# EAGLE board Genus_MainBoard_Std - v.1.0 (EAGLE 9.5.2), part 1 of 2
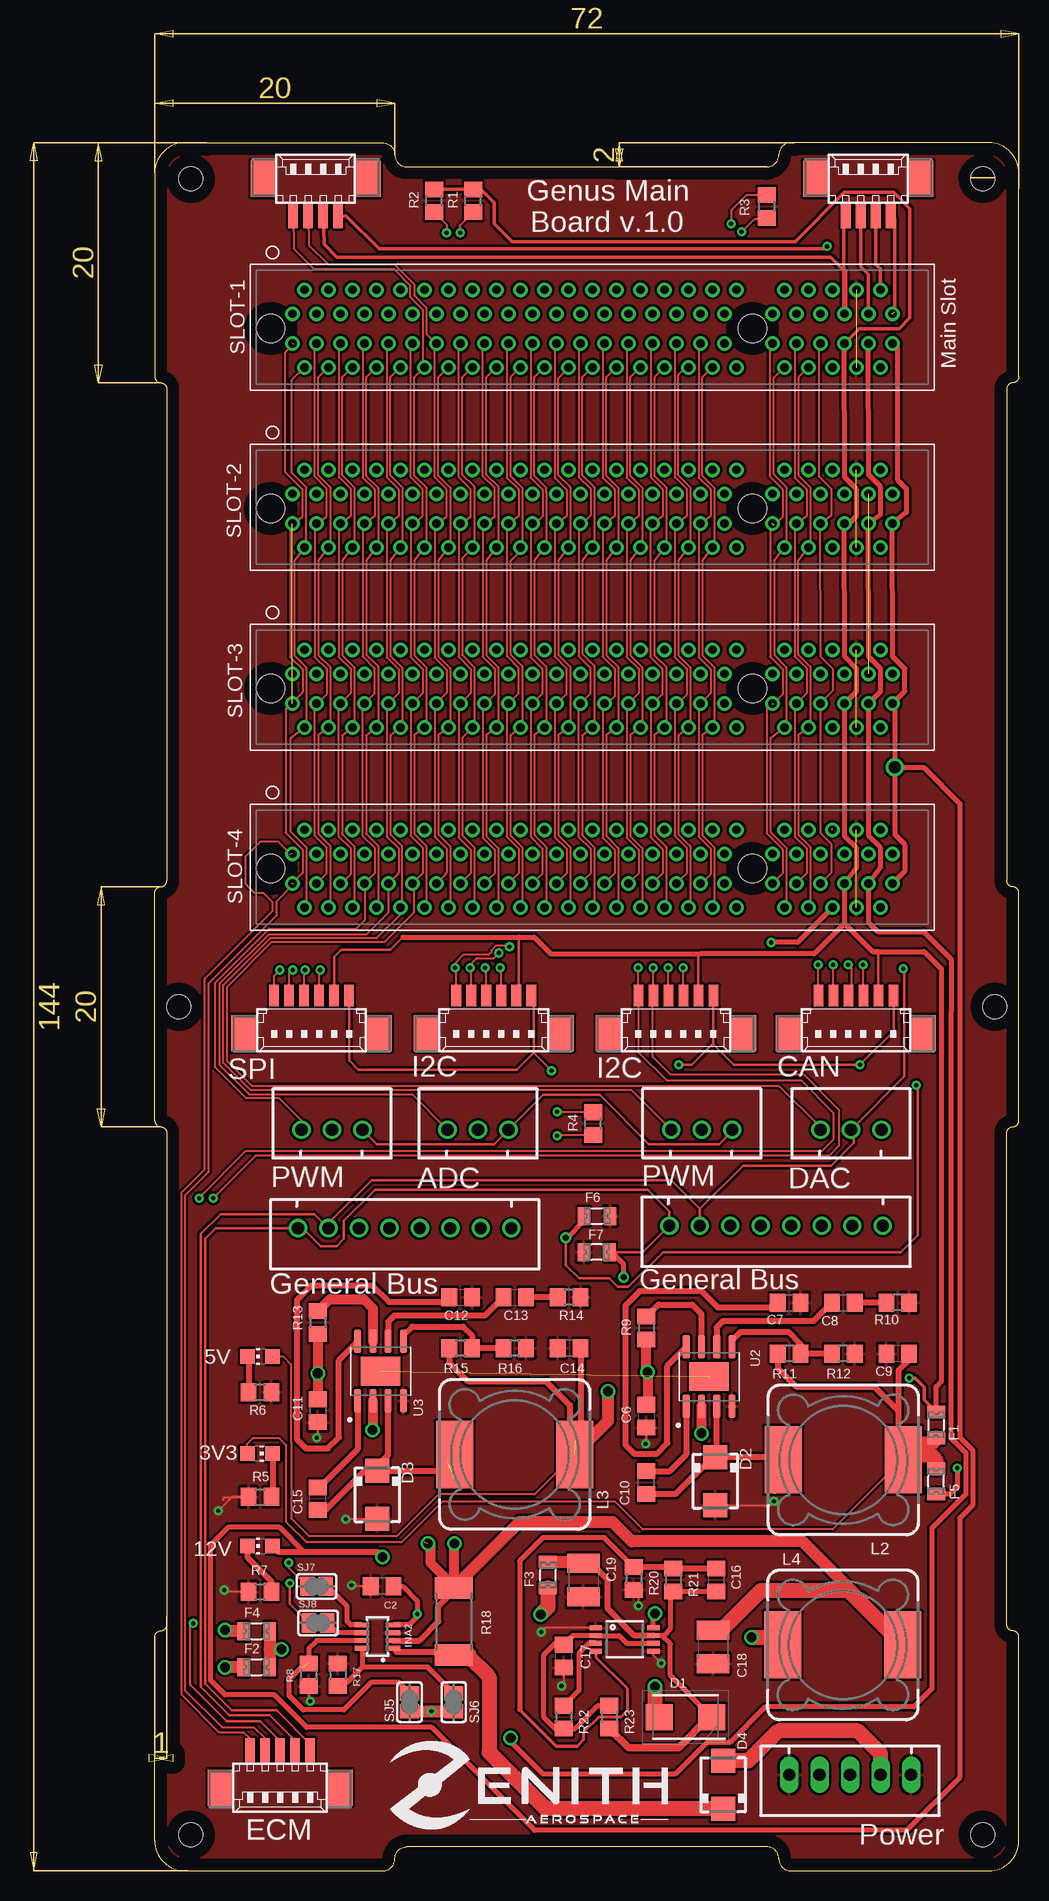
[diagram p0: board, top side]
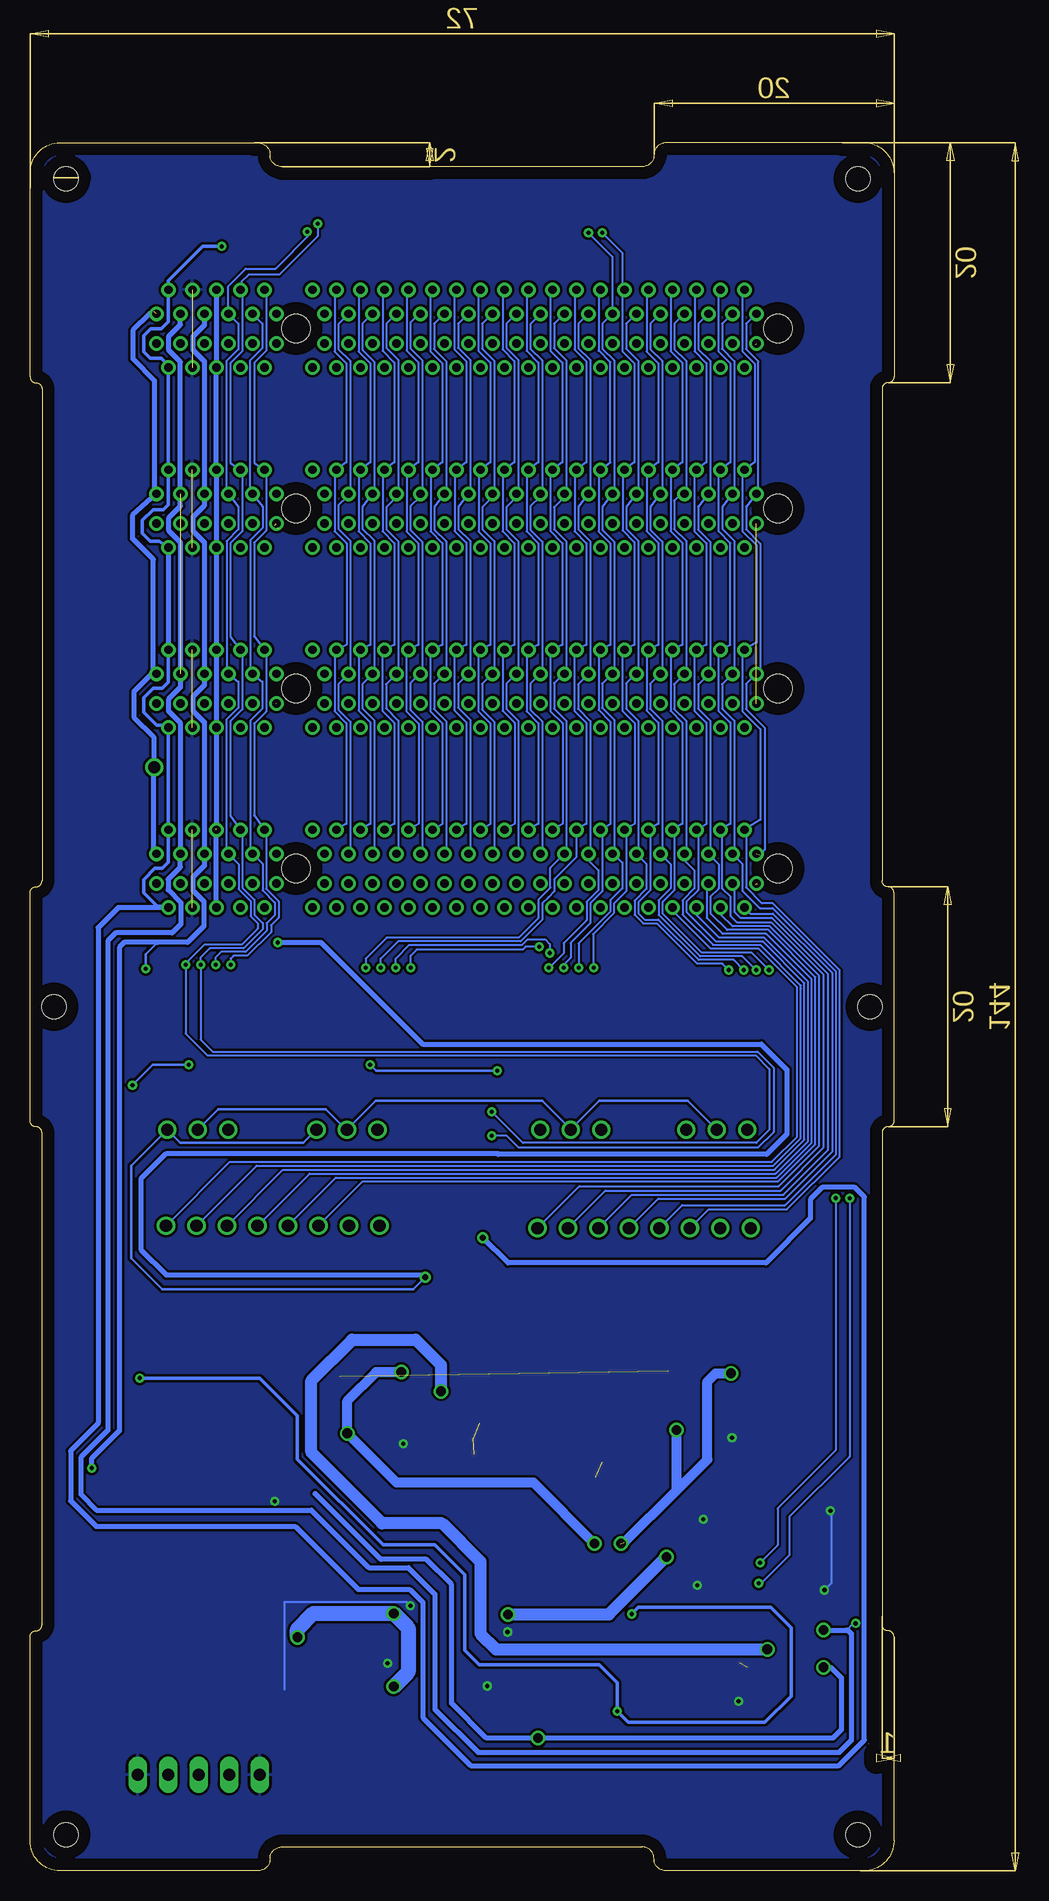
[diagram p1: board, bottom side, seen from below]

Size 72 x 144 mm. Coordinates in mm from the lower left corner, seen from the top.
Outline: 0,2.5 0,19.5 arc-90 0.5,20 arc90 1,20.5 1,61.5 arc90 0.5,62 arc-90 0,62.5 0,81.5 arc-90 0.5,82 arc90 1,82.5 1,123.5 arc90 0.5,124 arc-90 0,124.5 0,141.5 arc-90 2.5,144 19,144 arc-90 20,143 arc90 21,142 51,142 arc90 52,143 arc-90 53,144 69.5,144 arc-90 72,141.5 72,124.5 arc-90 71.5,124 arc90 71,123.5 71,82.5 arc90 71.5,82 arc-90 72,81.5 72,62.5 arc-90 71.5,62 arc90 71,61.5 71,20.5 arc90 71.5,20 arc-90 72,19.5 72,2.5 arc-90 69.5,0 53,0 arc-90 52,1 arc90 51,2 21,2 arc90 20,1 arc-90 19,0 2.5,0 arc-90 0,2.5
Copper layers (1*16): Top 0.035mm / dielectric 1.5mm / Bottom 0.035mm
Design rules "default": minimum track width 6mil, minimum drill 0.35mm, track to track 6mil, track to pad 6mil, pad to pad 6mil, via to via 6mil, smd to smd 6mil, copper to edge 40mil, drill to drill 6mil, minimum pad ring 10mil, minimum via ring 8mil, stop-mask expansion 4mil, vias tented up to drill 0mil, thermal gap 10mil
Holes 2 mm at 69,141 3,141 3,3 69,3 70,72 2,72

## Footprints (pad centres in the part's own frame; a part is rotated, then mirrored left to right if it is on the bottom)
CHIP-LED0805 = smd 1.2 x 1.2: A 0,-1.05; C 0,1.05
C0805 = smd 1.3 x 1.5: 1 -0.95,0; 2 0.95,0
C1210 = smd 1.6 x 2.7: 1 -1.4,0; 2 1.4,0
DIOM5436X247N = smd 2.25 x 2.15: 1 -2.2,0; 2 2.2,0
SMA = smd 2 x 2: A 2,0; C -2,0
0805L = smd 1 x 1.5: 1 -1.1,0; 2 1.1,0
SOT23-8 = smd 0.4 x 1.2: 1 -0.975,-1.3; 2 -0.325,-1.3; 3 0.325,-1.3; 4 0.975,-1.3; 5 0.975,1.3; 6 0.325,1.3; 7 -0.325,1.3; 8 -0.975,1.3
SRR1280 = smd 5.6 x 3.1: 1 0.635,5; 2 0.635,-5
R0805 = smd 1.3 x 1.5: 1 -0.95,0; 2 0.95,0
R2512 = smd 1.8 x 3.2: 1 -2.8,0; 2 2.8,0
SOLDERJUMPER_REFLOW_NOPASTE = smd 1.168 x 1.6: 1 -0.762,0; 2 0.762,0
PCIE-098-02-X-D-TH = drill 0.7 pad 1.1: A1 25,-1.24; A2 24,-3.24; A3 23,-1.24; A4 22,-3.24; A5 21,-1.24; A6 20,-3.24; A7 19,-1.24; A8 18,-3.24; A9 17,-1.24; A10 16,-3.24; A11 15,-1.24; A12 12,-3.24; A13 11,-1.24; A14 10,-3.24; A15 9,-1.24; A16 8,-3.24; A17 7,-1.24; A18 6,-3.24; A19 5,-1.24; A20 4,-3.24; A21 3,-1.24; A22 2,-3.24; A23 1,-1.24; A24 0,-3.24; A25 -1,-1.24; A26 -2,-3.24; A27 -3,-1.24; A28 -4,-3.24; A29 -5,-1.24; A30 -6,-3.24; A31 -7,-1.24; A32 -8,-3.24; A33 -9,-1.24; A34 -10,-3.24; A35 -11,-1.24; A36 -12,-3.24; A37 -13,-1.24; A38 -14,-3.24; A39 -15,-1.24; A40 -16,-3.24; A41 -17,-1.24; A42 -18,-3.24; A43 -19,-1.24; A44 -20,-3.24; A45 -21,-1.24; A46 -22,-3.24; A47 -23,-1.24; A48 -24,-3.24; A49 -25,-1.24; B1 25,1.24; B2 24,3.24; B3 23,1.24; B4 22,3.24; B5 21,1.24; B6 20,3.24; B7 19,1.24; B8 18,3.24; B9 17,1.24; B10 16,3.24; B11 15,1.24; B12 12,3.24; B13 11,1.24; B14 10,3.24; B15 9,1.24; B16 8,3.24; B17 7,1.24; B18 6,3.24; B19 5,1.24; B20 4,3.24; B21 3,1.24; B22 2,3.24; B23 1,1.24; B24 0,3.24; B25 -1,1.24; B26 -2,3.24; B27 -3,1.24; B28 -4,3.24; B29 -5,1.24; B30 -6,3.24; B31 -7,1.24; B32 -8,3.24; B33 -9,1.24; B34 -10,3.24; B35 -11,1.24; B36 -12,3.24; B37 -13,1.24; B38 -14,3.24; B39 -15,1.24; B40 -16,3.24; B41 -17,1.24; B42 -18,3.24; B43 -19,1.24; B44 -20,3.24; B45 -21,1.24; B46 -22,3.24; B47 -23,1.24; B48 -24,3.24; B49 -25,1.24 | hole 2.35: 13.35,0; -26.81,0
SOIC127P600X170-9N = smd 1.97 x 0.6: 1 -2.475,1.905; 2 -2.475,0.635; 3 -2.475,-0.635; 4 -2.475,-1.905; 5 2.475,-1.905; 6 2.475,-0.635; 7 2.475,0.635; 8 2.475,1.905 | smd 2.41 x 3.3: 9 0,0
MSOP-8 = smd 0.41 x 1.02: 1 -0.975,-2.4; 2 -0.325,-2.4; 3 0.325,-2.4; 4 0.975,-2.4; 5 0.975,2.4; 6 0.325,2.4; 7 -0.325,2.4; 8 -0.975,2.4
53398-06 = smd 0.8 x 1.8: 1 3.125,-2.5; 2 1.875,-2.5; 3 0.625,-2.5; 4 -0.625,-2.5; 5 -1.875,-2.5; 6 -3.125,-2.5 | smd 2.1 x 3: S1 5.625,0.625; S2 -5.625,0.625
JST-XH-03-PACKAGE-ROUND-PAD = drill 1.016: 1 -2.54,0; 2 0,0; 3 2.54,0
JST-XH-08-PACKAGE-ROUND-PAD = drill 1.016: 1 -8.89,0; 2 -6.35,0; 3 -3.81,0; 4 -1.27,0; 5 1.27,0; 6 3.81,0; 7 6.35,0; 8 8.89,0
53261-04 = smd 0.8 x 2: 1 1.875,-2.5; 2 0.625,-2.5; 3 -0.625,-2.5; 4 -1.875,-2.5 | smd 2.1 x 3: S1 4.375,0.625; S2 -4.375,0.625
53261-05 = smd 0.8 x 2: 1 2.5,-2.5; 2 1.25,-2.5; 3 0,-2.5; 4 -1.25,-2.5; 5 -2.5,-2.5 | smd 2.1 x 3: S1 5,0.625; S2 -5,0.625
JST-XH-05-PACKAGE-LONG-PAD = drill 1.016 long: 1 -5.08,0; 2 -2.54,0; 3 0,0; 4 2.54,0; 5 5.08,0

## Placement (x,y rotation side)
3V3  [CHIP-LED0805]  8.76,34.76 270 top
5V  [CHIP-LED0805]  8.76,42.86 90 top
12V  [CHIP-LED0805]  8.76,27.06 90 top
C2  [C0805]  18.94,23.7 180 top
C6  10uF  [C0805]  40.96,37.89 270 top
C7  0.1uF  [C0805]  52.87,47.35 0 top
C8  3.9nF  [C0805]  57.38,47.35 0 top
C9  22uF  [C0805]  61.91,43.1 180 top
C10  10nF  [C0805]  40.96,32.35 90 top
C11  10uF  [C0805]  13.58,38.34 270 top
C12  0.1uF  [C0805]  25.49,47.8 0 top
C13  3.9nF  [C0805]  30,47.8 0 top
C14  22uF  [C0805]  34.53,43.55 180 top
C15  10nF  [C0805]  13.58,31 90 top
C16  39pF  [C0805]  46.77,24.24 270 top
C17  100nF  [C0805]  34.07,17.89 90 top
C18  22uF  [C1210]  46.52,18.65 270 top
C19  68uF  [C1210]  35.72,24.24 270 top
D1  MBRS140T3G  [DIOM5436X247N]  44.23,12.81 180 top
D2  B130-13-F  [SMA]  46.71,32.47 270 top
D3  B130-13-F  [SMA]  18.53,31.32 270 top
D4  S1M  [SMA]  47.36,7.16 90 top
F1  0805L075  [0805L]  65.11,37.16 270 top
F2  0805L075  [0805L]  8.46,16.96 0 top
F3  0805L075  [0805L]  32.76,24.66 90 top
F4  0805L075  [0805L]  8.46,19.96 0 top
F5  0805L075  [0805L]  65.11,32.46 90 top
F6  0805L075  [0805L]  36.86,54.56 0 top
F7  0805L075  [0805L]  36.83,51.56 180 top
INA2  INA219BIDCNT  [SOT23-8]  18.56,19.51 90 top
L2  SRR1280  [SRR1280]  57.37,33.61 90 top
L3  SRR1280  [SRR1280]  29.99,34.06 90 top
L4  6.8uH  [SRR1280]  57.34,19.46 270 top
R1  4,7k  [R0805]  26.52,139.17 90 top
R2  4,7k  [R0805]  23.27,139.17 90 top
R3  120  [R0805]  50.98,138.7 270 top
R4  120  [R0805]  36.52,62.26 90 top
R5  220  [R0805]  8.76,31.16 0 top
R6  330  [R0805]  8.76,39.86 180 top
R7  600  [R0805]  8.76,23.26 0 top
R8  10K  [R0805]  12.85,16.34 90 top
R9  100K  [R0805]  40.96,45.23 270 top
R10  6.8K  [R0805]  61.91,47.35 180 top
R11  26.1K  [R0805]  52.87,43.1 180 top
R12  10K  [R0805]  57.38,43.1 180 top
R13  100K  [R0805]  13.58,45.68 270 top
R14  6.8K  [R0805]  34.53,47.8 180 top
R15  26.1K  [R0805]  25.49,43.55 180 top
R16  10K  [R0805]  30,43.55 180 top
R17  10K  [R0805]  15.26,16.34 270 top
R18  0.1  [R2512]  24.91,20.78 270 top
R20  50K  [R0805]  39.91,24.36 270 top
R21  150K  [R0805]  43.21,24.24 270 top
R22  200K  [R0805]  34.07,12.81 270 top
R23  200K  [R0805]  37.88,12.81 270 top
SJ5  [SOLDERJUMPER_REFLOW_NOPASTE]  21.23,14.05 90 top
SJ6  [SOLDERJUMPER_REFLOW_NOPASTE]  24.91,14.05 90 top
SJ7  [SOLDERJUMPER_REFLOW_NOPASTE]  13.48,23.7 0 top
SJ8  [SOLDERJUMPER_REFLOW_NOPASTE]  13.61,20.65 0 top
SLOT-1  PCIE-098-02-X-D-TH  [PCIE-098-02-X-D-TH]  36.47,128.51 0 top
SLOT-2  PCIE-098-02-X-D-TH  [PCIE-098-02-X-D-TH]  36.47,113.51 0 top
SLOT-3  PCIE-098-02-X-D-TH  [PCIE-098-02-X-D-TH]  36.47,98.51 0 top
SLOT-4  PCIE-098-02-X-D-TH  [PCIE-098-02-X-D-TH]  36.47,83.51 0 top
U2  MP2307DN-LF-Z  [SOIC127P600X170-9N]  46.19,41.19 90 top
U3  MP2307DN-LF-Z  [SOIC127P600X170-9N]  18.81,41.64 90 top
U$3  LM2621SMD  [MSOP-8]  39.15,19.28 270 top
X1  53398-06  [53398-06]  28.25,70.43 180 top
X2  53398-06  [53398-06]  43.43,70.43 180 top
X3  JST-XH-03-PIN-ROUND-PAD  [JST-XH-03-PACKAGE-ROUND-PAD]  14.77,61.76 0 top
X4  JST-XH-03-PIN-ROUND-PAD  [JST-XH-03-PACKAGE-ROUND-PAD]  45.59,61.76 0 top
X5  53398-06  [53398-06]  58.42,70.43 180 top
X6  JST-XH-03-PIN-ROUND-PAD  [JST-XH-03-PACKAGE-ROUND-PAD]  26.93,61.76 0 top
X7  JST-XH-03-PIN-ROUND-PAD  [JST-XH-03-PACKAGE-ROUND-PAD]  58.02,61.76 0 top
X8  JST-XH-08-PIN-ROUND-PAD  [JST-XH-08-PACKAGE-ROUND-PAD]  51.77,53.76 180 top
X9  53398-06  [53398-06]  13.06,70.43 180 top
X10  JST-XH-08-PIN-ROUND-PAD  [JST-XH-08-PACKAGE-ROUND-PAD]  20.82,53.56 180 top
X11  53261-04  [53261-04]  13.4,140.4 0 top
X12  53261-04  [53261-04]  59.46,140.4 0 top
X13  53261-05  [53261-05]  10.44,7.56 180 top
X15  JST-XH-05-PIN-ROUND-PAD  [JST-XH-05-PACKAGE-LONG-PAD]  57.94,8.01 180 top

## Library data of the parts
3V3 5V 12V = led
C2 C6-C19 = rcl; SPICEPREFIX: C
D1 = MBRS140T3G; ALLIED_NUMBER: 70099505; ALLIED_PRICE/STOCK: http://www.alliedelec.com/on-semiconductor-mbrs140t3g/70099505/; ARROW_PART_NUMBER: MBRS140T3G; ARROW_PRICE/STOCK: https://www.arrow.com/en/products/mbrs140t3g/on-semiconductor; HEIGHT: 2.47mm; MANUFACTURER_NAME: ON Semiconductor; MANUFACTURER_PART_NUMBER: MBRS140T3G; RS_PART_NUMBER: 5452074P; RS_PRICE/STOCK: http://uk.rs-online.com/web/p/products/5452074P
D2 D3 = B130-13-F; AVAILABILITY: Unavailable; DESCRIPTION: Diode Schottky 30V 1A Surface Mount SMA; MF: Multicomp; MP: B130-13-F; PACKAGE: DO-214 Multicomp; PRICE: None
D4 = diode
F1-F7 = polyfuse-smd_10; MF: Littelfuse; MPN: 0805L075; OC_FARNELL: 1832105RL; OC_NEWARK: 18M4777
INA2 SJ5-SJ8 = microbuilder
L2-L4 = inductor-bourns
R1-R18 R20-R23 = rcl; SPICEPREFIX: R
SLOT-1-SLOT-4 = Z_BUS; AVAILABILITY: Unavailable; DESCRIPTION: 98 Position Female Connector PCI Express™ Gold 0.039 _1.00mm_ Black; MF: Samtec; MP: PCIE-098-02-F-D-TH; PACKAGE: None; PRICE: None
U2 U3 = MP2307DN-LF-Z; AVAILABILITY: Unavailable; DESCRIPTION: Buck Switching Regulator IC Positive Adjustable 0.925V 1 Output 3A 8-SOIC _0.154, 3.90mm Width_ Exposed Pad; MF: Monolithic Power; MP: MP2307DN-LF-Z; PACKAGE: SOIC-8 Monolithic Power; PRICE: None
U$3 = SparkFun-PowerIC
X1 X2 X5 X9 = con-zenith; MF: MOLEX; OC_FARNELL: 1125368; OC_NEWARK: unknown
X3 X4 X6-X8 X10 X15 = JST-XH-Zenith
X11 X12 = con-zenith; MF: MOLEX; OC_FARNELL: 1125374; OC_NEWARK: unknown
X13 = con-zenith; MF: MOLEX; OC_FARNELL: 1433644; OC_NEWARK: unknown

## Nets
3V3: 3V3.A C9.1 F1.2 F5.2 L2.2 R11.2
3V3_A: C2.1 F1.1 INA2.4 R1.2 R2.2 SJ5.1 SJ6.1 SLOT-1.A5 SLOT-2.A5 SLOT-3.A5 SLOT-4.A5 X1.5 X2.5 X5.5 X9.5
3V3_B: F5.1 SLOT-1.B5 SLOT-2.B5 SLOT-3.B5 SLOT-4.B5 X3.2 X4.2 X6.2 X7.2 X8.7 X10.7 X11.2 X12.4 X13.4
5V: 5V.A C14.1 F2.2 F4.2 L3.2 R15.2
5V_A: F2.1 SLOT-1.A3 SLOT-2.A3 SLOT-3.A3 SLOT-4.A3
5V_B: F4.1 SLOT-1.B3 SLOT-2.B3 SLOT-3.B3 SLOT-4.B3 X12.3 X13.3
12V: 12V.A F3.1 SLOT-1.A1 SLOT-1.B1 SLOT-2.A1 SLOT-2.B1 SLOT-3.A1 SLOT-3.B1 SLOT-4.A1 SLOT-4.B1 X12.1
ADC_1: R1.1 SJ7.1 SLOT-1.B37 SLOT-2.B37 SLOT-3.B37 SLOT-4.B37 X1.2 X2.2
ADC_2: SLOT-1.A37 SLOT-2.A37 SLOT-3.A37 SLOT-4.A37 X11.3
ADC_3: R2.1 SJ8.1 SLOT-1.B38 SLOT-2.B38 SLOT-3.B38 SLOT-4.B38 X1.1 X2.1
ADC_4: SLOT-1.A38 SLOT-2.A38 SLOT-3.A38 SLOT-4.A38 X11.4
ADC_5: SLOT-1.B39 SLOT-2.B39 SLOT-3.B39 SLOT-4.B39 X9.4
ADC_6: SLOT-1.A39 SLOT-2.A39 SLOT-3.A39 SLOT-4.A39 X7.1
ADC_7: SLOT-1.B40 SLOT-2.B40 SLOT-3.B40 SLOT-4.B40 X9.3
ADC_8: SLOT-1.A40 SLOT-2.A40 SLOT-3.A40 SLOT-4.A40 X4.1
ADC_9: SLOT-1.B41 SLOT-2.B41 SLOT-3.B41 SLOT-4.B41 X9.2
ADC_10: SLOT-1.A41 SLOT-2.A41 SLOT-3.A41 SLOT-4.A41 X6.1
ADC_11: SLOT-1.B42 SLOT-2.B42 SLOT-3.B42 SLOT-4.B42 X9.1
ADC_12: SLOT-1.A42 SLOT-2.A42 SLOT-3.A42 SLOT-4.A42 X8.1
BAT1: X15.4
BAT2: X15.3
BAT_IN: D4.C INA2.1 R18.2
BAT_INA_OUT: C6.1 C11.1 C18.1 INA2.2 L4.1 R9.2 R13.2 R18.1 U2.2 U3.2
CAN_HIGH: R3.2 R4.2 SLOT-1.B7 SLOT-2.B7 SLOT-3.B7 SLOT-4.B7 X5.4
CAN_LOW: R3.1 R4.1 SLOT-1.B8 SLOT-2.B8 SLOT-3.B8 SLOT-4.B8 X5.3
DAC_1: SLOT-1.B28 SLOT-2.B28 SLOT-3.B28 SLOT-4.B28
DAC_2: SLOT-1.A28 SLOT-2.A28 SLOT-3.A28 SLOT-4.A28
DAC_3: SLOT-1.B29 SLOT-2.B29 SLOT-3.B29 SLOT-4.B29
DAC_4: SLOT-1.A29 SLOT-2.A29 SLOT-3.A29 SLOT-4.A29
DAC_5: SLOT-1.B30 SLOT-2.B30 SLOT-3.B30 SLOT-4.B30
DAC_6: SLOT-1.A30 SLOT-2.A30 SLOT-3.A30 SLOT-4.A30
EP: U2.9 U3.9
GEP_1: SLOT-1.B48 SLOT-2.B48 SLOT-3.B48 SLOT-4.B48 X10.6
GEP_2: SLOT-1.A48 SLOT-2.A48 SLOT-3.A48 SLOT-4.A48 X10.4
GEP_3: SLOT-1.B49 SLOT-2.B49 SLOT-3.B49 SLOT-4.B49 X13.1
GEP_4: SLOT-1.A49 SLOT-2.A49 SLOT-3.A49 SLOT-4.A49 X13.2
GEP_5: SLOT-1.A7 SLOT-2.A7 SLOT-3.A7 SLOT-4.A7
GEP_6: SLOT-1.A8 SLOT-2.A8 SLOT-3.A8 SLOT-4.A8
GEP_7: SLOT-1.A9 SLOT-2.A9 SLOT-3.A9 SLOT-4.A9
GEP_8: SLOT-1.A10 SLOT-2.A10 SLOT-3.A10 SLOT-4.A10
GEP_9: SLOT-1.A11 SLOT-2.A11 SLOT-3.A11 SLOT-4.A11
GIP_1: SLOT-1.B43 SLOT-2.B43 SLOT-3.B43 SLOT-4.B43 X8.2
GIP_2: SLOT-1.A43 SLOT-2.A43 SLOT-3.A43 SLOT-4.A43 X3.1
GIP_3: SLOT-1.B44 SLOT-2.B44 SLOT-3.B44 SLOT-4.B44 X8.3
GIP_4: SLOT-1.A44 SLOT-2.A44 SLOT-3.A44 SLOT-4.A44 X8.4
GIP_5: SLOT-1.B45 SLOT-2.B45 SLOT-3.B45 SLOT-4.B45 X8.6
GIP_6: SLOT-1.A45 SLOT-2.A45 SLOT-3.A45 SLOT-4.A45 X8.5
GIP_7: SLOT-1.B46 SLOT-2.B46 SLOT-3.B46 SLOT-4.B46 X10.2
GIP_8: SLOT-1.A46 SLOT-2.A46 SLOT-3.A46 SLOT-4.A46 X10.1
GIP_9: SLOT-1.B47 SLOT-2.B47 SLOT-3.B47 SLOT-4.B47 X10.5
GIP_10: SLOT-1.A47 SLOT-2.A47 SLOT-3.A47 SLOT-4.A47 X10.3
GND: C2.2 C6.2 C7.2 C9.2 C11.2 C12.2 C14.2 C17.1 C18.2 C19.2 D2.A D3.A F6.2 F7.2 INA2.3 R5.1 R6.1 R7.1 R8.1 R10.1 R12.1 R14.1 R16.1 R17.1 R20.2 SLOT-1.A4 SLOT-1.B4 SLOT-2.A4 SLOT-2.B4 SLOT-3.A4 SLOT-3.B4 SLOT-4.A4 SLOT-4.B4 U2.4 U3.4 U$3.1 U$3.5 X15.1 X15.5
GND_1: F6.1 SLOT-1.A2 SLOT-1.B2 SLOT-2.A2 SLOT-2.B2 SLOT-3.A2 SLOT-3.B2 SLOT-4.A2 SLOT-4.B2 X1.6 X2.6 X5.6 X9.6 X11.1 X12.2
GND_3: F7.1 SLOT-1.A6 SLOT-1.B6 SLOT-2.A6 SLOT-2.B6 SLOT-3.A6 SLOT-3.B6 SLOT-4.A6 SLOT-4.B6 X3.3 X4.3 X6.3 X7.3 X8.8 X10.8 X13.5
INT_1: SLOT-1.B16 SLOT-2.B16 SLOT-3.B16 SLOT-4.B16
INT_1_(E): SLOT-1.A22 SLOT-2.A22 SLOT-3.A22 SLOT-4.A22
INT_2: SLOT-1.A16 SLOT-2.A16 SLOT-3.A16 SLOT-4.A16
INT_2_(E): SLOT-1.A23 SLOT-2.A23 SLOT-3.A23 SLOT-4.A23
INT_3: SLOT-1.B17 SLOT-2.B17 SLOT-3.B17 SLOT-4.B17
INT_3_(E): SLOT-1.A24 SLOT-2.A24 SLOT-3.A24 SLOT-4.A24
INT_4: SLOT-1.A17 SLOT-2.A17 SLOT-3.A17 SLOT-4.A17
INT_4_(E): SLOT-1.A25 SLOT-2.A25 SLOT-3.A25 SLOT-4.A25
INT_5: SLOT-1.B18 SLOT-2.B18 SLOT-3.B18 SLOT-4.B18
INT_5_(E): SLOT-1.A26 SLOT-2.A26 SLOT-3.A26 SLOT-4.A26
INT_6: SLOT-1.A18 SLOT-2.A18 SLOT-3.A18 SLOT-4.A18
INT_6_(E): SLOT-1.A27 SLOT-2.A27 SLOT-3.A27 SLOT-4.A27
INT_7: SLOT-1.B19 SLOT-2.B19 SLOT-3.B19 SLOT-4.B19
INT_8: SLOT-1.A19 SLOT-2.A19 SLOT-3.A19 SLOT-4.A19
INT_9: SLOT-1.B20 SLOT-2.B20 SLOT-3.B20 SLOT-4.B20
INT_10: SLOT-1.A20 SLOT-2.A20 SLOT-3.A20 SLOT-4.A20
INT_11: SLOT-1.B21 SLOT-2.B21 SLOT-3.B21 SLOT-4.B21
INT_12: SLOT-1.A21 SLOT-2.A21 SLOT-3.A21 SLOT-4.A21
MISO_1: SLOT-1.B15 SLOT-2.B15 SLOT-3.B15 SLOT-4.B15
MISO_2: SLOT-1.B22 SLOT-2.B22 SLOT-3.B22 SLOT-4.B22
MOSI_1: SLOT-1.A14 SLOT-2.A14 SLOT-3.A14 SLOT-4.A14
MOSI_2: SLOT-1.B23 SLOT-2.B23 SLOT-3.B23 SLOT-4.B23
N$6: D4.A X15.2
N$12: C16.2 C19.1 D1.1 F3.2 R21.2 R23.2 U$3.7
N$13: 12V.C R7.2
N$14: INA2.8 R17.2 SJ6.2
N$15: INA2.7 R8.2 SJ5.2
N$16: INA2.5 SJ7.2
N$17: R9.1 U2.7
N$18: C8.2 R10.2
N$19: C7.1 U2.8
N$20: C8.1 U2.6
N$21: C10.1 D2.C L2.1 U2.3
N$22: R11.1 R12.2 U2.5
N$23: C10.2 U2.1
N$24: R13.1 U3.7
N$25: C13.2 R14.2
N$26: C12.1 U3.8
N$27: C13.1 U3.6
N$28: C15.1 D3.C L3.1 U3.3
N$29: R15.1 R16.2 U3.5
N$30: C15.2 U3.1
N$31: INA2.6 SJ8.2
N$32: C16.1 R20.1 R21.1 U$3.4
N$33: D1.2 L4.2 U$3.8
N$34: C17.2 R22.2 R23.1 U$3.2 U$3.6
N$35: R22.1 U$3.3
N$36: 5V.C R6.2
N$37: 3V3.C R5.2
PWM_1: SLOT-1.B31 SLOT-2.B31 SLOT-3.B31 SLOT-4.B31
PWM_2: SLOT-1.A31 SLOT-2.A31 SLOT-3.A31 SLOT-4.A31
PWM_3: SLOT-1.B32 SLOT-2.B32 SLOT-3.B32 SLOT-4.B32
PWM_4: SLOT-1.A32 SLOT-2.A32 SLOT-3.A32 SLOT-4.A32
PWM_5: SLOT-1.B33 SLOT-2.B33 SLOT-3.B33 SLOT-4.B33 X2.4
PWM_6: SLOT-1.A33 SLOT-2.A33 SLOT-3.A33 SLOT-4.A33
PWM_7: SLOT-1.B34 SLOT-2.B34 SLOT-3.B34 SLOT-4.B34 X2.3
PWM_8: SLOT-1.A34 SLOT-2.A34 SLOT-3.A34 SLOT-4.A34
PWM_9: SLOT-1.B35 SLOT-2.B35 SLOT-3.B35 SLOT-4.B35 X1.4
PWM_10: SLOT-1.A35 SLOT-2.A35 SLOT-3.A35 SLOT-4.A35
PWM_11: SLOT-1.B36 SLOT-2.B36 SLOT-3.B36 SLOT-4.B36 X1.3
PWM_12: SLOT-1.A36 SLOT-2.A36 SLOT-3.A36 SLOT-4.A36
SCL_1: SLOT-1.B9 SLOT-2.B9 SLOT-3.B9 SLOT-4.B9 X5.2
SCL_2: SLOT-1.B27 SLOT-2.B27 SLOT-3.B27 SLOT-4.B27
SCLK_1: SLOT-1.B14 SLOT-2.B14 SLOT-3.B14 SLOT-4.B14
SCLK_2: SLOT-1.B24 SLOT-2.B24 SLOT-3.B24 SLOT-4.B24
SDA_1: SLOT-1.B10 SLOT-2.B10 SLOT-3.B10 SLOT-4.B10 X5.1
SDA_2: SLOT-1.B26 SLOT-2.B26 SLOT-3.B26 SLOT-4.B26
SS_1: SLOT-1.A15 SLOT-2.A15 SLOT-3.A15 SLOT-4.A15
SS_2: SLOT-1.B25 SLOT-2.B25 SLOT-3.B25 SLOT-4.B25